# Altium PCB BLE_ADS.PcbDoc
Units mil, origin at the board's own origin, x right, y up, seen from the top; angles counter-clockwise.
Board outline 6000 x 4000 mil, 2 copper layers (Top Layer, Bottom Layer); 101 components, 66 nets, 360 pads, 0 vias.
Unrouted connection lines stored in the file: 215.
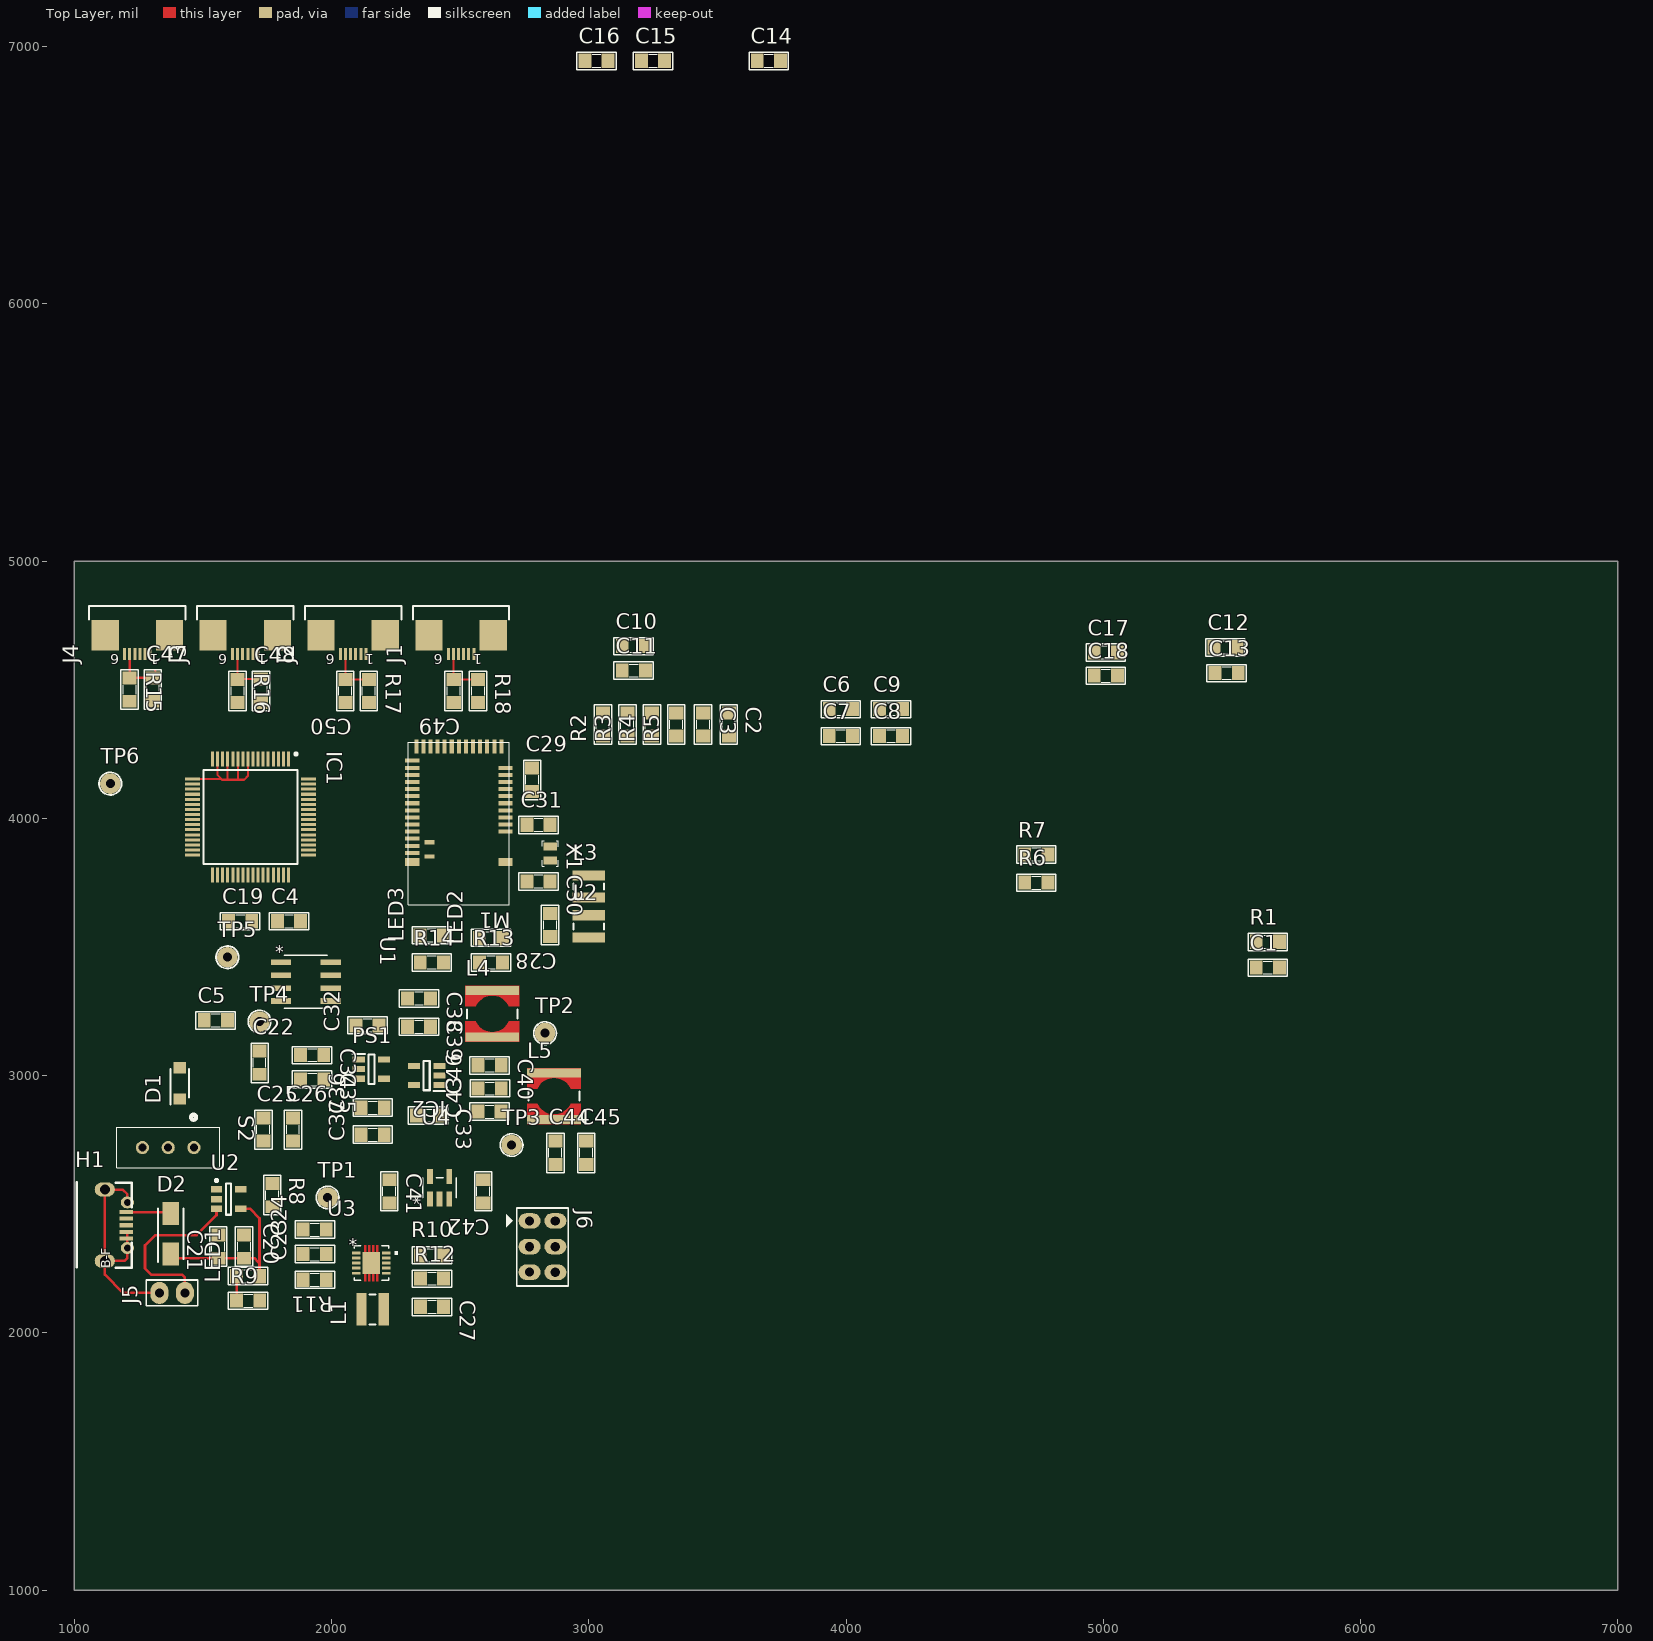
[diagram p0: Top Layer view]
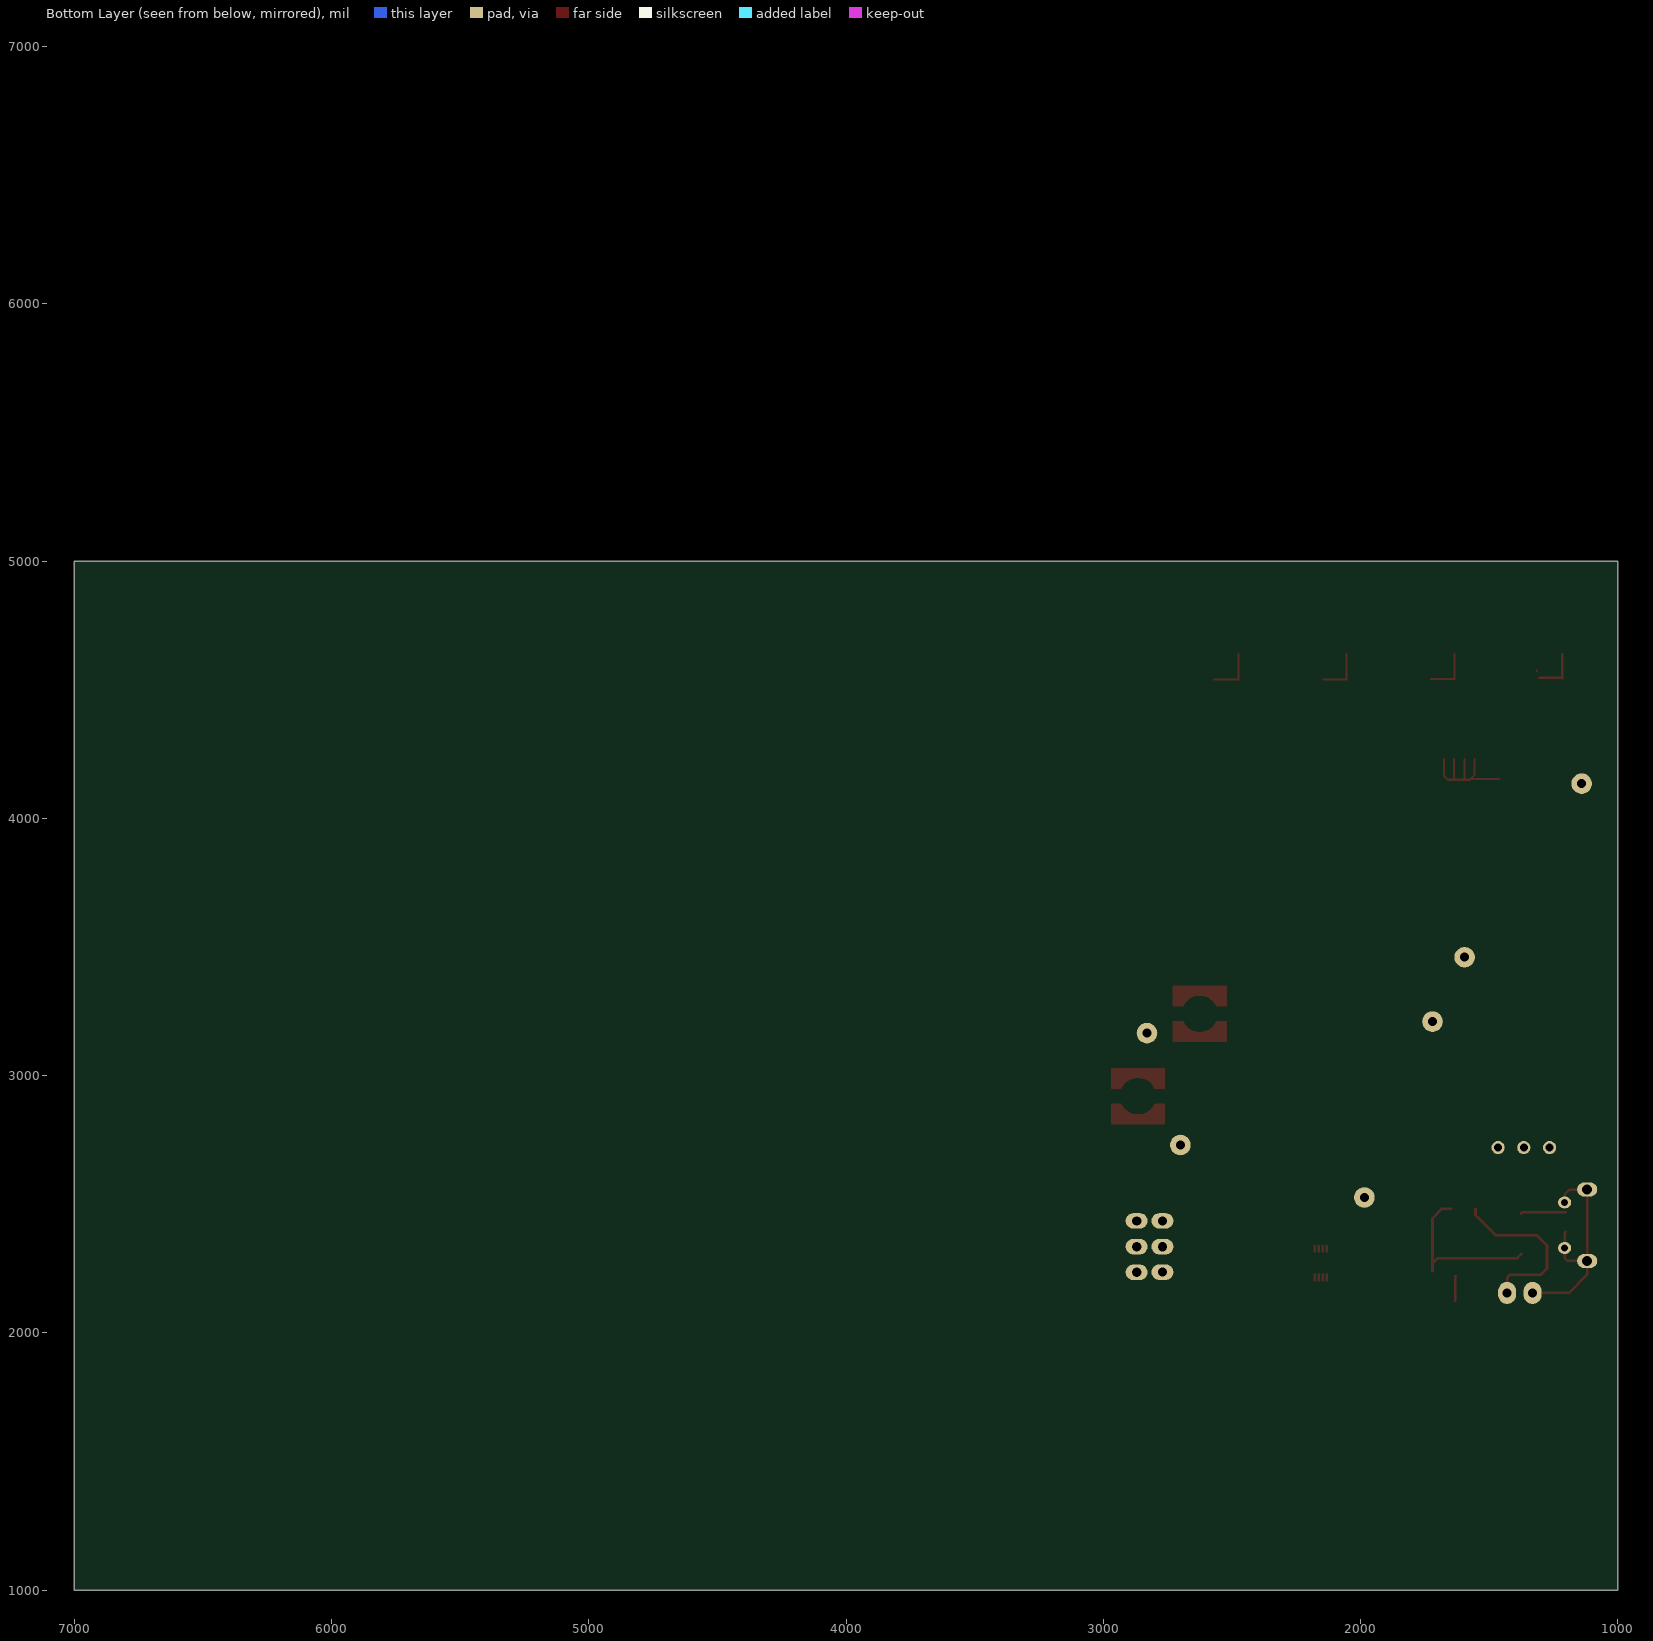
[diagram p1: Bottom Layer view, seen from below]

## Layer stack, top to bottom
Top Solder: solder mask 0.4, Solder Resist, Dk 3.5
Top Layer: signal copper 1.4
Dielectric 1: dielectric 12.6, FR-4, Dk 4.8
Bottom Layer: signal copper 1.4
Bottom Solder: solder mask 0.4, Solder Resist, Dk 3.5

## Board outline
1000,1000 7000,1000 7000,5000 1000,5000

## Design rules (kind name [scope] priority, off if disabled: settings)
Clearance [All] p1: gap=10
PolygonConnect [All] p1: connectstyle=Relief reliefconductorwidth=10 reliefentries=4 polygonreliefangle="90 Angle" airgapwidth=10
RoutingVias [All] p1: holewidth=28 width=50 viastyle="Through Hole" minholewidth=28 minwidth=50 maxholewidth=28 maxwidth=50
SolderMaskExpansion [All] p1: expansion=4
Width [All] p1: maxlimit=15 minlimit=8 preferedwidth=10
30 further rules are at their usual default settings.

## Classes and differential pairs
component class ADS_ExG: C1 C2 C3 C4 C5 C6 C7 C8 C9 C10 C11 C12 C13 C14 C15 C16 C17 C18 C19 C47 C48 C49 C50 IC1 J1 J2 J3 J4 R1 R2 R3 R4 R5 R6 R7 R15 R16 R17 R18 TP4 TP5 TP6 U1
component class "Battery circuit": C20 C21 C22 C23 C24 C25 C26 C27 D1 D2 H1 J5 JP1 L1 LED1 R8 R9 R10 R11 R12 S2 TP1 U2 U3
component class "BLE module": C28 C29 C30 C31 L2 L3 LED2 LED3 M1 R13 R14 X1
component class "Power supply": C32 C33 C34 C35 C36 C37 C38 C39 C40 C41 C42 C43 C44 C45 C46 IC2 J6 L4 L5 PS1 TP2 TP3 U4

## Components (designator, comment, footprint, x,y, rotation, side; value= is the part's Value field where it differs from the comment)
C1 "1nF" SM-0805 5640,3420 r0 top
C2 "1uF" SM-0805 3545,4365 r270 top
C3 "0.1uF" SM-0805 3445,4365 r270 top
C4 "0.1uF" SM-0805 1835,3600 r0 top
C5 "0.1uF" SM-0805 1550,3215 r0 top
C6 "1uF" SM-0805 3980,4425 r0 top
C7 "0.1uF" SM-0805 3980,4320 r0 top
C8 "1uF" SM-0805 4175,4320 r0 top
C9 "0.1uF" SM-0805 4175,4425 r0 top
C10 "1uF" SM-0805 3175,4670 r0 top
C11 "0.1uF" SM-0805 3175,4575 r0 top
C12 "1uF" SM-0805 5475,4665 r0 top
C13 "0.1uF" SM-0805 5480,4565 r0 top
C14 "1uF" SM-0805 3700,6945 r0 top
C15 "100uF" SM-0805 3250,6945 r0 top
C16 "1uF" SM-0805 3030,6945 r0 top
C17 "1uF" SM-0805 5010,4645 r0 top
C18 "0.1uF" SM-0805 5010,4555 r0 top
C19 "10uF" SM-0805 1645,3600 r0 top
C20 "47uF" SM-0805 1660,2335 r270 top
C21 "4uF/10V" SM-0805 1560,2335 r270 top
C22 "4uF/10V" SM-0805 1720,3050 r90 top
C23 "22uF" SM-0805 1934.68,2306.1 r180 top
C24 "22uF" SM-0805 1934.68,2401.1 r180 top
C25 "10uF" SM-0805 1735,2790 r90 top
C26 "104" SM-0805 1850,2790 r90 top
C27 "10pF" SM-0805 2390.68,2101.1 r0 top
C28 "1uF" SM-0805 2850,3585 r270 top
C29 "10uF" SM-0805 2780,4150 r90 top
C30 "12pF" SM-0805 2805,3755 r0 top
C31 "12pF" SM-0805 2805,3975 r0 top
C32 "1uF" SM-0805 2140,3195 r180 top
C33 "0.01uF" SM-0805 2375,2845 r0 top
C34 "10uF" SM-0805 1925,3080 r0 top
C35 "1uF" SM-0805 1925,2985 r0 top
C36 "10uF" SM-0805 2160,2875 r180 top
C37 "2.2uF" SM-0805 2160,2770 r180 top
C38 "2.2uF" SM-0805 2340,3300 r0 top
C39 "1uF" SM-0805 2340,3190 r0 top
C40 "10uF" SM-0805 2615,3040 r0 top
C41 "1uF" SM-0805 2225,2550 r270 top
C42 "1uF" SM-0805 2590,2550 r270 top
C43 "1uF" SM-0805 2614,2860 r180 top
C44 "10uF" SM-0805 2870,2700 r90 top
C45 "0.1uF" SM-0805 2990,2700 r90 top
C46 "2.2uF" SM-0805 2615,2950 r180 top
C47 "103" SM-0805 1305,4501 r90 top
C48 "103" SM-0805 1725,4496 r90 top
C49 "103" SM-0805 2475,4495 r270 top
C50 "103" SM-0805 2054,4495 r270 top
D1 "SS34FA" SODFL3618X143N 1410,2970 r90 top
D2 "N4007" DIOM5025X220N 1375,2385 r90 top
H1 "USB B Micro/Mini" "USB-B-MICRO-female Tai02" 1100,2430 r90 top
IC1 "ADS1299IPAGR" QFP50P1200X1200X120-64N 1685,4005 r270 top
IC2 "TPS72325DBVR" SOT95P280X145-5N 2370,3000 r180 top
J1 "Chan_01" 68710614022 2503.82,4740 r180 top
J2 "Chan_02" 68710614022 2084.21,4740 r180 top
J3 "Chan_03" 68710614022 1664.61,4740 r180 top
J4 "Chan_04" 68710614022 1245,4740 r180 top
J5 "Jumper 2" J2 1430,2155 r180 top
J6 "Connector 3x2" JP3x2 2820,2335 r270 top
L1 "1 uH, 1.75 A" WE-TPC_2811 2159.68,2091.1 r90 top
L2 "10 uH, 1 A" WE-TPC_2828 3000,3580 r0 top
L3 "15 uH, 0.72 A" WE-TPC_2828 3000,3735 r0 top
L4 "3.3 uH, 1.95 A" WE-TPC_4818 2625,3240 r0 top
L5 "3.3 uH, 1.95 A" WE-TPC_4818 2865,2920 r0 top
LED1 "LED" SM-0805 1675,2220 r180 top
LED2 "LED" SM-0805 2619,3535 r180 top
LED3 "LED" SM-0805 2389,3545 r180 top
M1 "MODULE_MDBT42Q" PCB_MDBT42Q_10X16 2495,3665 r180 top
PS1 "TPS60403DBVR" SOT95P280X145-5N 2155,3025 r0 top
R1 "499k, 01%" SM-0805 5640,3520 r0 top
R2 "10k" SM-0805 3055,4365 r90 top
R3 "10k" SM-0805 3150,4365 r90 top
R4 "10k" SM-0805 3245,4365 r90 top
R5 "10k" SM-0805 3340,4365 r90 top
R6 "10k" SM-0805 4740,3750 r0 top
R7 "10k" SM-0805 4740,3860 r0 top
R8 "2k" SM-0805 1770,2535 r270 top
R9 "470" SM-0805 1676,2125 r0 top
R10 "1M" SM-0805 2389.68,2301.1 r180 top
R11 "1M" SM-0805 1934.68,2206.1 r180 top
R12 "111k" SM-0805 2390.68,2211.1 r0 top
R13 "1k" SM-0805 2620,3440 r0 top
R14 "1k" SM-0805 2390,3440 r0 top
R15 "1k" SM-0805 1215,4500 r270 top
R16 "1k" SM-0805 1635,4495 r270 top
R17 "1k" SM-0805 2145,4495 r270 top
R18 "1k" SM-0805 2570,4495 r270 top
S2 "SS12SDP2" SS12SDP2 1365,2720 r270 top
TP1 "TP" TP1 1984.68,2526.1 r0 top
TP2 "TP" TP1 2830,3165 r0 top
TP3 "TP" TP1 2700,2730 r0 top
TP4 "TP" TP1 1720,3210 r0 top
TP5 "TP" TP1 1595,3460 r0 top
TP6 "TP" TP1 1140,4135 r0 top
U1 "Part Number: OPA2376AIDR" D8 1900,3365 r0 top
U2 "MCP73832T-2ACI/OT" SOT-23-OT5_N 1600,2520 r0 top
U3 "Part Number: TPS63060DSCR" DSC10_1P70X2P15 2154.68,2271.1 r0 top
U4 "TPS73225DBVR" DBV5 2420,2564 r90 top
X1 "32.768kHz" "Crystal 32.768kHz SMD" 2850,3895 r270 top

## Footprints (in the part's own frame and the unit in brackets; to place one, negate y for a bottom-side part, rotate by r counter-clockwise, add the part's x,y. Pads: shape width x height; smd on the part's side, far side on the other; paste and mask are expansions set on the pad)
68710614022 [mm] "ZIF Connectors, Horizontal, Top Contact, pitch 0.5mm, 6p"
  rect 0.3x1.2 smd: 1(-1.25,2.56) 2(-0.75,2.56) 3(-0.25,2.56) 4(0.25,2.56) 5(0.75,2.56) 6(1.25,2.56)
  rect 2.7x3 smd: MH1(-3.18,0.7) MH2(3.18,0.7)
  silkscreen extent -4.75,-2.15 4.75,-0.85, body extent -4.7,-2.15 4.7,2.95, height 2.1
"Crystal 32.768kHz SMD" [mm] "XT"
  rect 0.8x1.3 smd: 1(0.1,0) 2(1.5,0)
  silkscreen extent -0.45,-0.8 2.05,0.8
D8 [mil]
  rect 78x22 smd paste+0 mask+0: 1(-97,75) 2(-97,25) 3(-97,-25) 4(-97,-75) 5(97,-75) 6(97,-25) 7(97,25) 8(97,75)
  silkscreen extent -84,-104 84,104, body extent 0,0 10,10, height 10
DBV5 [mil]
  rect 58x22 smd paste+0 mask+0: 1(-44,37.4) 2(-44,0) 3(-44,-37.4) 4(44,-37.4) 5(44,37.4)
  silkscreen extent -40,-65 40,65, body extent 0,0 10,10, height 10
DIOM5025X220N [mm]
  rect 2.25x1.6 smd: 1(-2,0) 2(2,0)
  silkscreen extent -2.8,-1.25 2.5,1.25, body extent -2.5,-1.25 2.5,1.25, height 2.2
DSC10_1P70X2P15 [mm]
  rect 0.85x0.28 smd: 1(-1.475,1) 2(-1.475,0.5) 3(-1.475,0) 4(-1.475,-0.5) 5(-1.475,-1) 6(1.475,-1) 7(1.475,-0.5) 8(1.475,0) 9(1.475,0.5) 10(1.475,1)
  rect 1.7x2.15 smd paste-1.062 mask-1.067: 11(0,0)
  Top Layer region: -0.1,1.775 -0.1,1.075 -0.3,1.075 -0.3,1.775
  Top Layer region: 0.1,1.775 0.1,1.075 0.3,1.075 0.3,1.775
  Top Layer region: -0.5,1.775 -0.5,1.075 -0.7,1.075 -0.7,1.775
  Top Layer region: 0.5,1.775 0.5,1.075 0.7,1.075 0.7,1.775
  Top Layer region: -0.1,-1.775 -0.1,-1.075 -0.3,-1.075 -0.3,-1.775
  Top Layer region: 0.1,-1.775 0.1,-1.075 0.3,-1.075 0.3,-1.775
  Top Layer region: -0.5,-1.775 -0.5,-1.075 -0.7,-1.075 -0.7,-1.775
  Top Layer region: 0.5,-1.775 0.5,-1.075 0.7,-1.075 0.7,-1.775
  silkscreen extent -1.7,-1.7 2.59,1.7, body extent 0,0 0.25,0.25, height 0.25
J2 [mil] "Jum select vdd or gnd"
  oval 70x86 hole 36: 1(0,0) 2(99,0)
  silkscreen extent -50,-50 150,50
JP3x2 [mil] "Connector 3x2"
  oval 60x86 hole 36: 1(-100,-50) 2(0,-50) 3(99,-50) 4(-100,50) 5(0,50) 6(100,50)
  silkscreen extent -150,-141 153,100, body extent -150,-100 150,100, height 335
PCB_MDBT42Q_10X16 [mm]
  rect 1.4x0.8 smd mask+0: 1(-4.6,-4.2) 39(4.6,-4.2)
  rect 1.4x0.4 smd mask+0: 2(-4.6,-7.2) 3(-4.6,-7.9) 5(-4.6,-9.3) 6(-4.6,-10) 7(-4.6,-10.7) 8(-4.6,-11.4) 9(-4.6,-12.1) 10(-4.6,-12.8) 11(-4.6,-13.5) 25(4.6,-14.2) 26(4.6,-13.5) 27(4.6,-12.8) 28(4.6,-12.1) 29(4.6,-11.4) 30(4.6,-10.7) 31(4.6,-10) 32(4.6,-9.3) 33(4.6,-8.6) 34(4.6,-7.9) 35(4.6,-7.2) 36(4.6,-6.5) 37(4.6,-5.8) 38(4.6,-5.1)
  rect 1.4x0.4 smd: 4(-4.6,-8.6)
  rect 0.4x1.4 smd mask+0: 12(-4.2,-15.6) 13(-3.5,-15.6) 14(-2.8,-15.6) 15(-2.1,-15.6) 16(-1.4,-15.6) 17(-0.7,-15.6) 18(0,-15.6) 19(0.7,-15.6) 20(1.4,-15.6) 21(2.1,-15.6) 22(2.8,-15.6) 23(3.5,-15.6) 24(4.2,-15.6)
  rect 1x0.4 smd mask+0: 40(2.9,-4.75) 41(2.9,-6.15)
  silkscreen extent -5,-16 5,0
QFP50P1200X1200X120-64N [mm]
  rect 1.475x0.3 smd: 1(-5.738,3.75) 2(-5.738,3.25) 3(-5.738,2.75) 4(-5.738,2.25) 5(-5.738,1.75) 6(-5.738,1.25) 7(-5.738,0.75) 8(-5.738,0.25) 9(-5.738,-0.25) 10(-5.738,-0.75) 11(-5.738,-1.25) 12(-5.738,-1.75) 13(-5.738,-2.25) 14(-5.738,-2.75) 15(-5.738,-3.25) 16(-5.738,-3.75) 33(5.738,-3.75) 34(5.738,-3.25) 35(5.738,-2.75) 36(5.738,-2.25) 37(5.738,-1.75) 38(5.738,-1.25) 39(5.738,-0.75) 40(5.738,-0.25) 41(5.738,0.25) 42(5.738,0.75) 43(5.738,1.25) 44(5.738,1.75) 45(5.738,2.25) 46(5.738,2.75) 47(5.738,3.25) 48(5.738,3.75)
  rect 0.3x1.475 smd: 17(-3.75,-5.738) 18(-3.25,-5.738) 19(-2.75,-5.738) 20(-2.25,-5.738) 21(-1.75,-5.738) 22(-1.25,-5.738) 23(-0.75,-5.738) 24(-0.25,-5.738) 25(0.25,-5.738) 26(0.75,-5.738) 27(1.25,-5.738) 28(1.75,-5.738) 29(2.25,-5.738) 30(2.75,-5.738) 31(3.25,-5.738) 32(3.75,-5.738) 49(3.75,5.738) 50(3.25,5.738) 51(2.75,5.738) 52(2.25,5.738) 53(1.75,5.738) 54(1.25,5.738) 55(0.75,5.738) 56(0.25,5.738) 57(-0.25,5.738) 58(-0.75,5.738) 59(-1.25,5.738) 60(-1.75,5.738) 61(-2.25,5.738) 62(-2.75,5.738) 63(-3.25,5.738) 64(-3.75,5.738)
  silkscreen extent -6.35,-4.65 4.65,4.65, body extent -6,-6 6,6, height 1.2
SM-0805 [mil] "Compoment SMD 80x50mil"
  rect 50x55 smd: 1(-45,0) 2(45,0)
  silkscreen extent -77,-34 76,33, body extent -40,-25 40,25, height 24
SODFL3618X143N [mm]
  rect 1.12x1.22 smd: 1(-1.55,0) 2(1.55,0)
  silkscreen extent -2.11,-0.9 1.4,0.9, body extent -1.8,-0.9 1.8,0.9, height 1.43
SOT95P280X145-5N [mm]
  rect 1.2x0.6 smd: 1(-1.25,0.95) 2(-1.25,0) 3(-1.25,-0.95) 4(1.25,-0.95) 5(1.25,0.95)
  silkscreen extent -1.85,-1.45 0.3,1.5, body extent -1.4,-1.45 1.4,1.45, height 1.45
SOT-23-OT5_N [mm] "SOT23, 5-Leads, Body 2.9x1.6mm, Pitch 0.95mm, Lead Span 2.7mm, IPC Medium Density"
  rect 1.1x0.65 smd: 1(-1.2,0.95) 2(-1.2,0) 3(-1.2,-0.95) 4(1.2,-0.95) 5(1.2,0.95)
  silkscreen extent -1.32,-1.55 0.25,1.95, body extent -0.9,-1.55 0.9,1.55, height 1.45
SS12SDP2 [mm]
  round 1.3 hole 0.8: 1(0,2.54) 2(0,0) 3(0,-2.54)
  silkscreen extent -3.25,-5.1 2,5.1, body extent -2,-5.1 2,5.1, height 4
TP1 [mil] "Test point"
  round 80 hole 35: 1(0,0)
  silkscreen extent -44,-44 44,44
"USB-B-MICRO-female Tai02" [mm] "micro usb female type B"
  rect 0.4x1.35 smd: 1(1,-2.6) 2(0.35,-2.6) 3(-0.3,-2.6) 4(-0.95,-2.6) 5(-1.6,-2.6)
  oval 1.4x2 hole 1: 5(-3.825,-0.475) 5(3.225,-0.475)
  oval 1.15x1.3 hole 0.7: 5(-2.55,-2.7) 5(1.95,-2.7)
  silkscreen extent -4.5,-3.15 3.95,2.3
WE-TPC_2811 [mm] "Power Inductor, SMD, 2-Leads, body 2.78x2.78mm"
  rect 3.2x1 smd: 1(0,1.1) 2(0,-1.1)
  silkscreen extent -1.49,-0.3 1.49,0.3, body extent -1.39,-1.39 1.39,1.39, height 1.16
WE-TPC_2828 [mm] "Power Inductor, SMD, 2-Leads, body 2.8x2.8mm"
  rect 3.2x1 smd: 1(0,1.1) 2(0,-1.1)
  silkscreen extent -1.49,-0.3 1.49,0.3, body extent -1.4,-1.4 1.4,1.4, height 2.82
WE-TPC_4818 [mm] "Power Inductor, SMD, 2-Leads, body 4.8x4.8mm"
  rect 5.3x0.9 smd paste-403.566 mask-403.566: 1(0,2.3) 2(0,-2.3)
  Top Layer region: -2.65,0.75 -1.636,0.75 -1.636,0.75 -1.138,1.394 -0.407,1.753 0.407,1.753 1.138,1.394 1.636,0.75 1.636,0.75 2.65,0.75 2.65,0.75 2.65,2.75 -2.65,2.75
  Top Layer region: 2.65,-0.75 1.636,-0.75 1.636,-0.75 1.138,-1.394 0.407,-1.753 -0.407,-1.753 -1.138,-1.394 -1.636,-0.75 -1.636,-0.75 -2.65,-0.75 -2.65,-0.75 -2.65,-2.75 2.65,-2.75
  silkscreen extent -2.5,-0.45 2.5,0.45, body extent -2.4,-2.4 2.4,2.4, height 1.8

## Part data
C1 C2 C3 C4 C5 C6 C7 C8 C9 C10 C11 C12 C13 C14 C15 C16 C17 C18 C19 C20 C21 C22 C23 C24 C25 C26 C27 C28 C29 C30 C31 C32 C33 C34 C35 C36 C37 C38 C39 C40 C41 C42 C43 C44 C45 C46 C47 C48 C49 C50: library part CM, "Cap SMD"
D1: "Schottky Diode"
D2: library part EC11FS2, "Diode"
H1: library part "USB B Female Micro/Mini SMD", "USB B Female Micro/Mini SMD"
IC1 IC2: "Integrated Circuit"
J1 J2 J3 J4: library part 68710614022, "ZIF Connectors WR-FPC, Horizontal, Top Contact, pitch 0.5mm, 6pin"
J5: library part "JP 2"
J6: library part JP3x2
L1: library part 744028001, "SMT Shielded Tiny Power Inductor WE-TPC, size 2811, 1 uH, 1.75 A"
L2: library part 744025100, "SMT Shielded Tiny Power Inductor WE-TPC, size 2828, 10 uH, 1 A"
L3: library part 744025150, "SMT Shielded Tiny Power Inductor WE-TPC, size 2828, 15 uH, 0.72 A"
L4 L5: library part 744042003, "SMT Shielded Tiny Power Inductor WE-TPC, size 4818, 3.3 uH, 1.95 A"
LED1 LED2 LED3: "LED Single colour Green and Red"
M1: "MDBT42Q"
PS1: "Power Supply"
R1 R2 R3 R4 R5 R6 R7 R8 R9 R10 R11 R12 R13 R14 R15 R16 R17 R18: library part R, "Resistor 1/4W"
S2: "Switch"
TP1 TP2 TP3 TP4 TP5 TP6: library part TP1, "Test Point"
U1: library part OPA2376AIDR, "No Description Available"
U2: "Miniature Single-Cell, Fully Integrated Li-Ion, Li-Polymer Charge Management Controller, 4.2V, 5-Pin SOT-23, Industrial Temperature, Tape and Reel"
U3: library part TPS63060DSCR, "No Description Available"
U4: "No Description Available"
X1: library part Crystal, "Crystal For all Crystal 2pin."

## Nets (pads, with @x,y where several pads share a name; then routed paths per layer and width w, separated by ;. In a path a pad name is that pad's centre, name@x,y a point inside that pad or via, vN(x,y) a via of type N, cw(c..) or ccw(c..) an arc to the next point about the centre after c; other vN are vias at no path point)
+2.5V: C4.1 C6.2 C7.2 C8.2 C9.2 C12.2 C13.2 IC1.19 IC1.22 IC1.23 IC1.54 IC1.56 IC1.59 J1.4 J2.4 J3.4 J4.4 J6.5 U1.8
+2.5V_1: C44.2 C45.2 J6.2 L5.2 TP3.1
-2.5V: C2.1 C3.1 C5.2 C6.1 C7.1 C8.1 C9.1 C10.2 C11.2 C14.1 C15.1 C16.1 C19.1 IC1.20 IC1.21 IC1.25 IC1.32 IC1.53 IC1.57 IC1.58 J1.3 J2.3 J3.3 J4.3 J6.4 U1.4
-2.5V_1: C40.2 J6.1 L4.2 TP2.1
BIAS: C1.1 IC1.62 IC1.63 R1.1 TP4.1 U1.3
CS: IC1.39 M1.25 R6.1
DRDY: IC1.47 M1.30
DVDD: C17.2 C18.2 C29.2 IC1.48 IC1.50 IC1.52 J6.6 M1.11 R6.2 R7.2
DVDD_1: C23.2 C24.2 C34.2 C35.2 C42.2 J6.3 PS1.2 R10.2 R11.2 TP1.1 U3.9 U4.1 U4.3
ELEC_1: C49.1 J1.5 R18.1 | length 194.5
  Top Layer w8: J1.5 2474.29,4540.71 C49.1 R18.1
ELEC_2: C50.1 J2.5 R17.1 | length 190.5
  Top Layer w8: J2.5 2054.68,4540.68 C50.1 R17.1
ELEC_3: C48.2 J3.5 R16.1 | length 189.5
  Top Layer w8: R16.1 R16.1@1635.08,4540.08 ; J3.5 R16.1@1635.08,4540.08 ; C48.2 1636,4541 R16.1@1635.08,4540.08
ELEC_4: C47.2 J4.5 R15.1 | length 185.6
  Top Layer w8: R15.1 1215.47,4545.47 J4.5
  Top Layer w10: R15.1@1215.47,4545.47 1216,4546 C47.2 ; 1314,4573.5 1315,4574.5
GND: C4.2 C5.1 C10.1 C11.1 C12.1 C13.1 C17.1 C18.1 C20.1 C21.1 C22.1 C23.1 C24.1 C25.1 C26.1 C27.1 C28.1 C29.1 C30.1 C31.1 C33.2 C34.1 C35.1 C36.1 C37.1 C38.1 C39.1 C40.1 C41.1 C42.1 C43.1 C44.1 C45.1 C46.1 C47.1 C48.1 C49.2 C50.2 H1.4 H1.5 IC1.31 IC1.33 IC1.41 IC1.49 IC1.51 IC1.60 IC2.1 J1.2 J2.2 J3.2 J4.2 J5.2 LED2.2 LED3.2 M1.1 M1.12 M1.24 M1.39 PS1.4 R2.2 R3.2 R4.2 R5.2 R8.2 R12.1 U2.2 U3.4 U3.7 U3.11 U4.2 | length 895
  Top Layer w10: H1.4 1206.3,2388.66 1206.3,2329.61 1206.3,2291.3 1194.41,2279.41 H1.5@1118.7,2279.41 ; H1.5@1206.3,2506.77 1206.3,2538.7 1188.03,2556.97 1118.7,2556.97 H1.5@1118.7,2279.41 ; J5.2 1190,2155 1118.7,2226.3 H1.5@1118.7,2279.41
MISO: IC1.43 M1.26
MOSI: IC1.34 M1.27
NetC1_2: C1.2 IC1.61 R1.2
NetC2_2: C2.2 C3.2 IC1.55
NetC14_2: C14.2 IC1.30
NetC15_2: C15.2 IC1.28
NetC16_2: C16.2 IC1.26
NetC19_2: C19.2 IC1.24
NetC20_2: C20.2 C21.2 D2.1 LED1.1 U2.4 | length 646.3
  Top Layer w10: D2.1 1391.26,2290 C21.2 C20.2 1700,2290 1715,2275 ; U2.4 1682.4,2482.6 1720,2445 LED1.1@1720,2240
NetC22_2: C22.2 D1.2 J5.1 U2.3 | length 670.9
  Top Layer w10: J5.1 1430,2215 1420,2225 1300,2225 1275,2250 1275,2340 1315,2380 1475,2380 1552.76,2457.76 U2.3
NetC26_2: C26.2 U3.6
NetC27_2: C27.2 R10.1 R12.2 U3.8
NetC28_2: C28.2 L2.2 M1.9
NetC30_2: C30.2 M1.13 X1.2
NetC31_2: C31.2 M1.14 X1.1
NetC32_1: C32.1 PS1.5
NetC32_2: C32.2 PS1.3
NetC33_1: C33.1 IC2.4
NetC36_2: C36.2 C37.2 IC2.2 IC2.3 PS1.1
NetC38_2: C38.2 C39.2 IC2.5 L4.1
NetC41_2: C41.2 U4.4
NetC43_2: C43.2 C46.2 L5.1 U4.5
NetD1_1: D1.1 S2.2
NetD2_2: D2.2 H1.1 | length 175
  Top Layer w10: H1.1 1369.37,2469.37 D2.2
NetIC1_9: IC1.9 IC1.11 IC1.13 IC1.15 IC1.17 TP6.1 U1.6 U1.7 | length 538.8
  Top Layer w8: IC1.17 1572.36,4152.64 ; IC1.15 1557.05,4180 1557.05,4167.95 1572.36,4152.64 ; IC1.13 1596.42,4153.58 1600,4150 ; IC1.11 1635.79,4154.21 1640,4150 ; IC1.9 1675.16,4165.16 1660,4150 1640,4150 ; 1572.36,4152.64 1575,4150 1600,4150 ; 1600,4150 1640,4150
NetIC1_10: IC1.10 R15.2
NetIC1_12: IC1.12 R16.2
NetIC1_14: IC1.14 R17.2
NetIC1_16: IC1.16 R18.2
NetIC1_42: IC1.42 R5.1
NetIC1_44: IC1.44 R4.1
NetIC1_45: IC1.45 R3.1
NetIC1_46: IC1.46 R2.1
NetL1_1: L1.1 U3.1
NetL1_2: L1.2 U3.10
NetL2_1: L2.1 L3.2
NetL3_1: L3.1 M1.10
NetLED1_2: LED1.2 R9.1 | length 95.4
  Top Layer w10: LED1.2 1631,2219 R9.1
NetLED2_1: LED2.1 R13.2
NetLED3_1: LED3.1 R14.2
NetM1_31: M1.31 R14.1
NetM1_32: M1.32 R13.1
NetR8_1: R8.1 U2.5
NetR9_2: R9.2 U2.1
NetR11_1: R11.1 U3.5
NetU1_1: U1.1 U1.2
PWDN: IC1.35 M1.34 R7.1
REF_IN: TP5.1 U1.5
RESET: IC1.36 M1.41
SCK: IC1.40 M1.28
START: IC1.38 M1.38
VCC: C25.2 S2.3 U3.2 U3.3
pads on no net: H1.2 H1.3 IC1.1 IC1.2 IC1.3 IC1.4 IC1.5 IC1.6 IC1.7 IC1.8 IC1.18 IC1.27 IC1.29 IC1.37 IC1.64 J1.1 J1.6 J1.MH1 J1.MH2 J2.1 J2.6 J2.MH1 J2.MH2 J3.1 J3.6 J3.MH1 J3.MH2 J4.1 J4.6 J4.MH1 J4.MH2 M1.2 M1.3 M1.4 M1.5 M1.6 M1.7 M1.8 M1.15 M1.16 M1.17 M1.18 M1.19 M1.20 M1.21 M1.22 M1.23 M1.29 M1.33 M1.35 M1.36 M1.37 M1.40 S2.1

## Text inside footprints (layer, text, board x,y; h text height)
H1: Top Overlay "B-F" at 1139.37,2250.87 h35.43 r90
J1: Top Overlay "1" at 2586.5,4637.24 h39.37 r180; Top Overlay "6" at 2432.95,4637.24 h39.37 r180
J2: Top Overlay "1" at 2166.89,4637.24 h39.37 r180; Top Overlay "6" at 2013.35,4637.24 h39.37 r180
J3: Top Overlay "1" at 1747.28,4637.24 h39.37 r180; Top Overlay "6" at 1593.74,4637.24 h39.37 r180
J4: Top Overlay "1" at 1327.68,4637.24 h39.37 r180; Top Overlay "6" at 1174.13,4637.24 h39.37 r180
M1: Mechanical 2 "No ground pad" at 2597.95,3739.41 h17.72 r180; Mechanical 3 "Toplayer no ground pad" at 2605.24,3971.1 h11.81 r180
U1: Top Overlay "*" at 1780.5,3457 h50; Mechanical 13 "*" at 1824,3410.5 h50; Mechanical 7 "0.157in/3.988mm" at 1806.25,3558.5 h25; Mechanical 7 "0.197in/5.004mm" at 2098.5,3352.5 h25; Mechanical 7 "0.05in/1.27mm" at 1520.5,3402.5 h25; Mechanical 7 "0.05in/1.27mm" at 1721.75,3146.5 h25
U3: Top Overlay "*" at 2066.91,2316.5 h50; Mechanical 13 "*" at 2090.18,2274.5 h50
U4: Top Overlay "*" at 2365.6,2497.5 h50 r90; Mechanical 13 "*" at 2403.6,2527 h50 r90